# EAGLE board But (EAGLE 7.2.0)
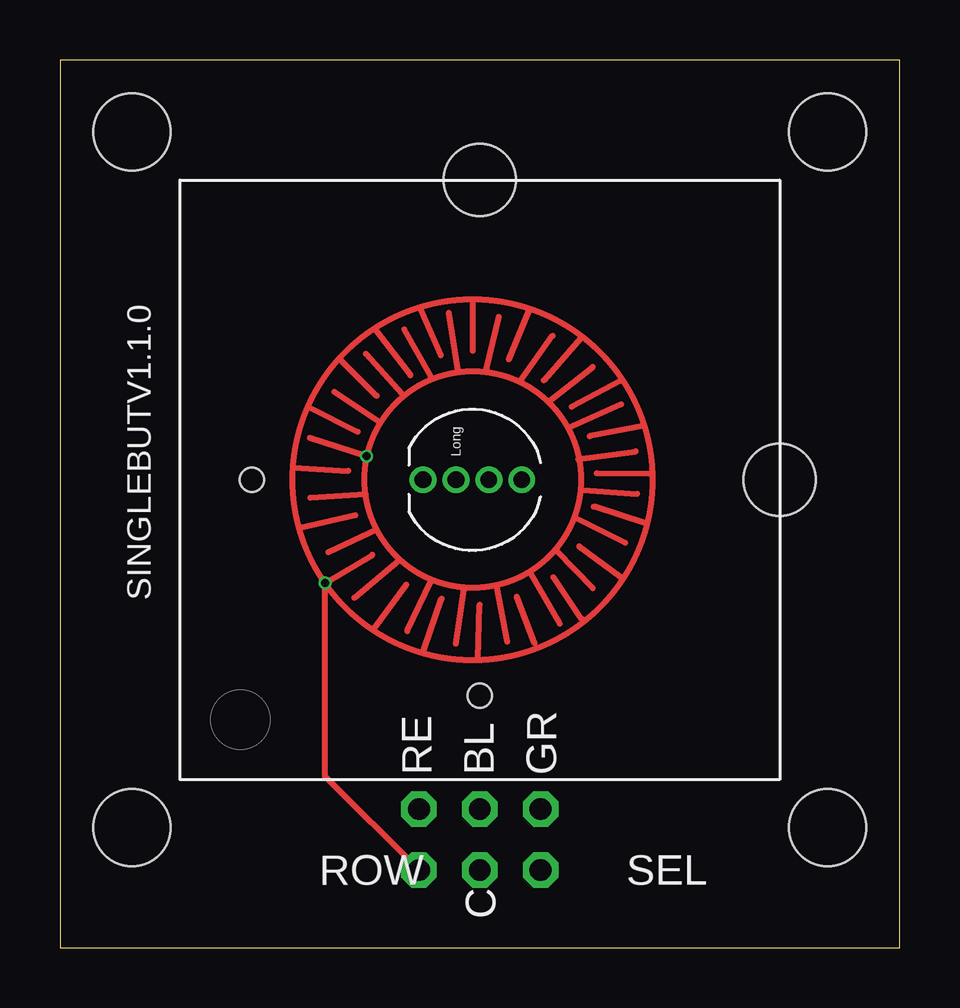
[diagram p0: board, top side]
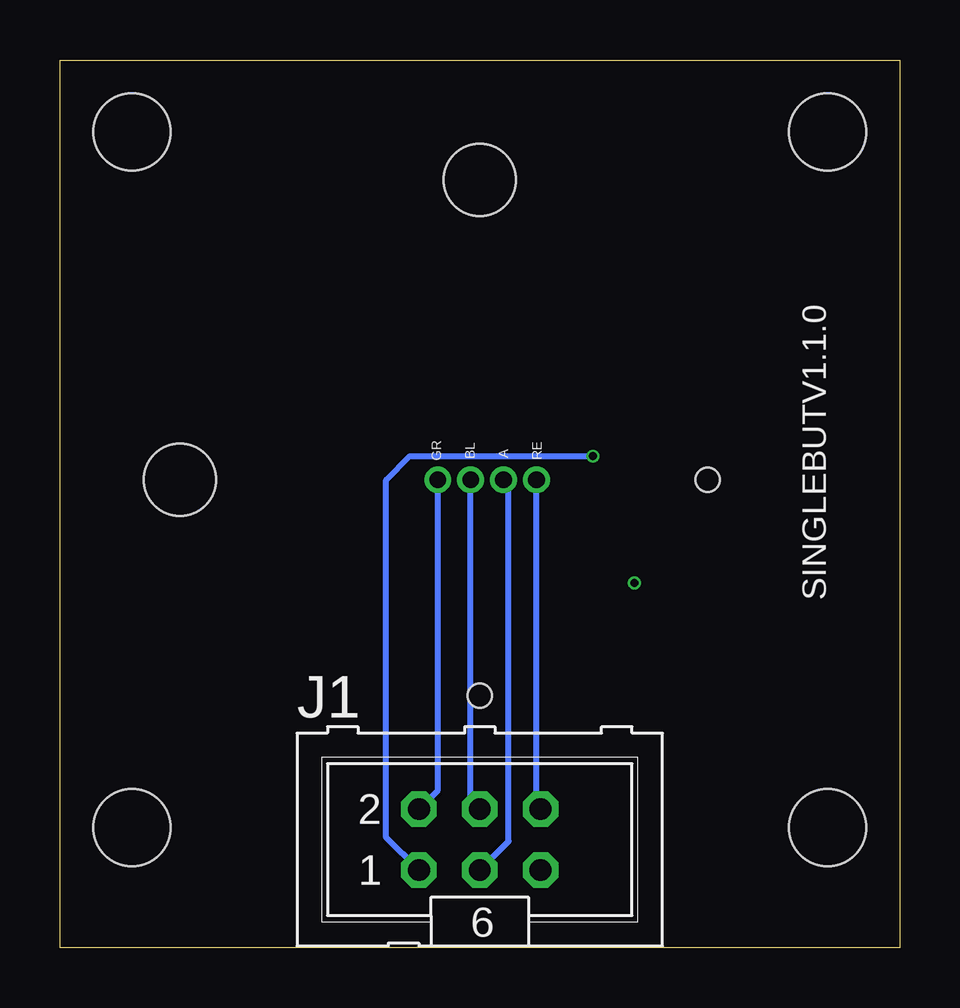
[diagram p1: board, bottom side, seen from below]

Size 35 x 37 mm. Coordinates in mm from the lower left corner, seen from the top.
Outline: 0,0 35,0 35,37 0,37 0,0
Copper layers (1*16): Top 0.035mm / dielectric 1.5mm / Bottom 0.035mm
Design rules "default *": minimum track width 10mil, minimum drill 0.6095mm, track to track 8mil, track to pad 8mil, pad to pad 8mil, via to via 8mil, smd to smd 8mil, copper to edge 8mil, drill to drill 8mil, minimum pad ring 0.1mm, minimum via ring 8mil, stop-mask expansion 4mil, vias tented up to drill 0mil, thermal gap 10mil
Net classes: 0 default: clearance 0.205 mm
Holes 3.2 mm at 3,34 32,34 32,5 3,5

## Footprints (pad centres in the part's own frame; a part is rotated, then mirrored left to right if it is on the bottom)
ML6 = drill 0.914 octagon: 1 -2.54,-1.27; 2 -2.54,1.27; 3 0,-1.27; 4 0,1.27; 5 2.54,-1.27; 6 2.54,1.27
BUTTONPAD1X1 = drill 0.7 pad 1: BLU1 12.878,12.5; GND1 11.506,12.5; GRN1 14.249,12.5; RED1 10.135,12.5 | drill 0.33: SIG01 6.05,8.198; SIG02 7.777,13.481 | hole 3: 12.5,25; 25,12.5 | hole 1: 3,12.5; 12.5,3.5

## Placement (x,y rotation side)
J1  [ML6]  17.5,4.5 0 bottom
SINGLEBUTV1.1.0  BUTTONPAD1X1  [BUTTONPAD1X1]  5,7 0 top

## Library data of the parts
J1 = con-ml_Ivan; OC_FARNELL: unknown; OC_NEWARK: unknown
SINGLEBUTV1.1.0 = Rubberbutton

## Nets
N$1: J1.5 SINGLEBUTV1.1.0.SIG01
N$2: J1.6 SINGLEBUTV1.1.0.RED1
N$3: J1.4 SINGLEBUTV1.1.0.BLU1
N$4: J1.2 SINGLEBUTV1.1.0.GRN1
N$5: J1.3 SINGLEBUTV1.1.0.GND1
N$6: J1.1 SINGLEBUTV1.1.0.SIG02

## Tracks (layer width: path | path; a pad name or v marks a point on that pad's centre or on a via)
N$1
  Top 0.254: J1.5 11.05,7.14 SINGLEBUTV1.1.0.SIG01
N$2
  Bottom 0.254: J1.6 15.13,5.95 SINGLEBUTV1.1.0.RED1
N$3
  Bottom 0.254: J1.4 17.88,6.15 SINGLEBUTV1.1.0.BLU1
N$4
  Bottom 0.254: J1.2 19.25,6.56 SINGLEBUTV1.1.0.GRN1
N$5
  Bottom 0.254: J1.3 16.3,4.43 16.3,19.2 16.51,19.41 SINGLEBUTV1.1.0.GND1
N$6
  Bottom 0.254: J1.1 21.4,4.59 21.4,19.5 20.42,20.48 SINGLEBUTV1.1.0.SIG02

## Text on the board
tNames: RE | BL | GR | ROW | SEL | C